# EAGLE board CT_schematic (EAGLE 7.6.0)

Size 100 x 80 mm. Coordinates in mm from the lower left corner, seen from the top.
Outline: 0,0 100,0 100,80 0,80 0,0
Copper layers (1*16): Top 0.035mm / dielectric 1.5mm / Bottom 0.035mm
Design rules "default": minimum track width 10mil, minimum drill 24mil, track to track 8mil, track to pad 8mil, pad to pad 8mil, via to via 8mil, smd to smd 8mil, copper to edge 40mil, drill to drill 8mil, minimum pad ring 10mil, minimum via ring 8mil, stop-mask expansion 4mil, vias tented up to drill 0mil, thermal gap 10mil

## Footprints (pad centres in the part's own frame; a part is rotated, then mirrored left to right if it is on the bottom)
C0603 = smd 0.8 x 0.8: 1 -0.762,0; 2 0.762,0
C0402 = smd 0.5 x 0.5: 1 -0.508,0; 2 0.508,0
C1210 = smd 1.2 x 2.5: 1 -1.524,0; 2 1.524,0
R0603 = smd 0.8 x 0.8: 1 -0.762,0; 2 0.762,0
EXV-9H = smd 3.505 x 1.676: 1 -2.857,0; 2 2.857,0
L0603 = smd 0.8 x 0.8: 1 -0.762,0; 2 0.762,0
IND25X25CZ = smd 2.489 x 3.429: 1 -2.718,0; 2 2.718,0
PJ-037B_PACKAGE = drill 3.7 square: 1 12,0 | drill 3.2 square: 2 6,0
LQFP48 = smd 0.3 x 1.2: 1 -2.75,-4.25; 2 -2.25,-4.25; 3 -1.75,-4.25; 4 -1.25,-4.25; 5 -0.75,-4.25; 6 -0.25,-4.25; 7 0.25,-4.25; 8 0.75,-4.25; 9 1.25,-4.25; 10 1.75,-4.25; 11 2.25,-4.25; 12 2.75,-4.25; 25 2.75,4.25; 26 2.25,4.25; 27 1.75,4.25; 28 1.25,4.25; 29 0.75,4.25; 30 0.25,4.25; 31 -0.25,4.25; 32 -0.75,4.25; 33 -1.25,4.25; 34 -1.75,4.25; 35 -2.25,4.25; 36 -2.75,4.25 | smd 1.2 x 0.3: 13 4.25,-2.75; 14 4.25,-2.25; 15 4.25,-1.75; 16 4.25,-1.25; 17 4.25,-0.75; 18 4.25,-0.25; 19 4.25,0.25; 20 4.25,0.75; 21 4.25,1.25; 22 4.25,1.75; 23 4.25,2.25; 24 4.25,2.75; 37 -4.25,2.75; 38 -4.25,2.25; 39 -4.25,1.75; 40 -4.25,1.25; 41 -4.25,0.75; 42 -4.25,0.25; 43 -4.25,-0.25; 44 -4.25,-0.75; 45 -4.25,-1.25; 46 -4.25,-1.75; 47 -4.25,-2.25; 48 -4.25,-2.75
SAMTEC_FTSH-105-01-L-DV-K = smd 0.762 x 2.794: 1 -2.54,-2.032; 2 -2.54,2.032; 3 -1.27,-2.032; 4 -1.27,2.032; 5 0,-2.032; 6 0,2.032; 7 1.27,-2.032; 8 1.27,2.032; 9 2.54,-2.032; 10 2.54,2.032
QFN-32 = smd 0.6 x 0.3: 1 -2.3,1.75; 2 -2.3,1.25; 3 -2.3,0.75; 4 -2.3,0.25; 5 -2.3,-0.25; 6 -2.3,-0.75; 7 -2.3,-1.25; 8 -2.3,-1.75; 17 2.3,-1.75; 18 2.3,-1.25; 19 2.3,-0.75; 20 2.3,-0.25; 21 2.3,0.25; 22 2.3,0.75; 23 2.3,1.25; 24 2.3,1.75 | smd 0.3 x 0.6: 9 -1.75,-2.3; 10 -1.25,-2.3; 11 -0.75,-2.3; 12 -0.25,-2.3; 13 0.25,-2.3; 14 0.75,-2.3; 15 1.25,-2.3; 16 1.75,-2.3; 25 1.75,2.3; 26 1.25,2.3; 27 0.75,2.3; 28 0.25,2.3; 29 -0.25,2.3; 30 -0.75,2.3; 31 -1.25,2.3; 32 -1.75,2.3 | smd 3.2 x 3.2: EXP 0,0
SJ-43515TS-SMT-TR = smd 2.2 x 3: 1 0.6,-7.4; 4 3.4,-7.4 | smd 3 x 3: 2 12.8,-7.4; 5 17,-3 | smd 2 x 3: 3 5.3,0; 6 2.5,0 | drill 1.8: P$7 4.5,-3.69; P$8 11.54,-3.69
WM-64PC = drill 0.6 pad 1: 1 -1,0.95; 2 -1,-0.95
VQFN-16 = smd 1.105 x 0.381: 1 -1.822,0.975; 2 -1.822,0.325; 3 -1.822,-0.325; 4 -1.822,-0.975; 9 1.822,-0.975; 10 1.822,-0.325; 11 1.822,0.325; 12 1.822,0.975 | smd 0.381 x 1.105: 5 -0.975,-1.822; 6 -0.325,-1.822; 7 0.325,-1.822; 8 0.975,-1.822; 13 0.975,1.822; 14 0.325,1.822; 15 -0.325,1.822; 16 -0.975,1.822
HTSS-105-01-G-D = drill 1 pad 1.8 square: 1 0,0 | drill 1 pad 1.8: 2 0,2.54; 3 2.54,0; 4 2.54,2.54; 5 5.08,0; 6 5.08,2.54; 7 7.62,0; 8 7.62,2.54; 9 10.16,0; 10 10.16,2.54
ASEK = smd 1.4 x 1: 1 -1.1,-0.8; 2 1.1,-0.8; 3 1.1,0.8; 4 -1.1,0.8
ASFL1 = smd 1.7 x 1.5: 1 -1.27,-1.1; 2 1.27,-1.1; 3 1.27,1.1; 4 -1.27,1.1
IR3899MTR1PBF = smd 0.25 x 0.75: 1 0,0; 2 0.5,0; 3 1,0; 4 1.5,0; 5 2,0; 6 2.5,0; 7 3,0 | smd 0.75 x 0.25: 8 3.425,0.78; 9 3.425,1.28; 10 3.425,1.78; 14 -0.425,1.78; 15 -0.425,1.28; 16 -0.425,0.78 | smd 0.3 x 1.95: 11 3.22,3.63 | smd 1.62 x 2.42: 12 1.786,3.8 | smd 1 x 1.95: 13 0.117,3.63 | smd 2.19 x 1.25: 17 1.51,1.26
SON-6 = smd 0.55 x 0.3: 1 -0.355,0.5 | smd 0.52 x 0.3: 2 -0.37,0; 3 -0.37,-0.5; 4 0.37,-0.5; 5 0.37,0; 6 0.37,0.5
SW_4-1437565-2 = smd 1.4 x 2.1: 1 -2.23,4.55; 2 -2.23,-4.55; 3 2.23,4.55; 4 2.23,-4.55
LGM67K-G1J2-24-Z = smd 0.8 x 1.4: A -2,0; C 0,0
NC7SZ125M5X = smd 1.3 x 0.7: 1 -1.3,0.95; 2 -1.3,0; 3 -1.3,-0.95; 4 1.3,-0.95; 5 1.3,0.95

## Placement (x,y rotation side)
C1  1e-06  [C0603]  -19.05,78.74 0 top  (outside the outline)
C2  1e-07  [C0603]  -22.86,78.74 0 top  (outside the outline)
C3  1e-07  [C0603]  -26.67,78.74 0 top  (outside the outline)
C4  1e-07  [C0603]  -30.48,78.74 0 top  (outside the outline)
C5  1e-07  [C0603]  -34.29,78.74 0 top  (outside the outline)
C6  1e-07  [C0603]  -38.1,78.74 0 top  (outside the outline)
C7  4.7e-06  [C0603]  -80.01,73.66 0 top  (outside the outline)
C8  2.2e-06  [C0603]  -83.82,73.66 0 top  (outside the outline)
C9  1e-08  [C0603]  -41.91,78.74 0 top  (outside the outline)
C10  1e-06  [C0603]  -45.72,78.74 0 top  (outside the outline)
C11  1e-07  [C0402]  -53.34,83.82 0 top  (outside the outline)
C12  1e-06  [C0603]  -49.53,78.74 0 top  (outside the outline)
C13  1e-06  [C0603]  -53.34,78.74 0 top  (outside the outline)
C14  1e-06  [C0603]  -57.15,78.74 0 top  (outside the outline)
C15  1e-06  [C0603]  -60.96,78.74 0 top  (outside the outline)
C16  1e-06  [C0603]  -64.77,78.74 0 top  (outside the outline)
C17  1e-06  [C0603]  -68.58,78.74 0 top  (outside the outline)
C18  1e-06  [C0603]  -72.39,78.74 0 top  (outside the outline)
C19  1e-07  [C0402]  -57.15,83.82 0 top  (outside the outline)
C20  1e-07  [C0402]  -60.96,83.82 0 top  (outside the outline)
C21  1e-07  [C0402]  -64.77,83.82 0 top  (outside the outline)
C22  1e-07  [C0402]  -68.58,83.82 0 top  (outside the outline)
C23  1e-06  [C0603]  -76.2,78.74 0 top  (outside the outline)
C24  1e-07  [C0402]  -72.39,83.82 0 top  (outside the outline)
C25  1e-07  [C0402]  -76.2,83.82 0 top  (outside the outline)
C26  1e-06  [C0603]  -80.01,78.74 0 top  (outside the outline)
C27  1e-08  [C0402]  -80.01,83.82 0 top  (outside the outline)
C28  1e-08  [C0402]  -83.82,83.82 0 top  (outside the outline)
C29  1e-08  [C0402]  -87.63,83.82 0 top  (outside the outline)
C30  0.0001  [C1210]  -16.51,63.5 0 top  (outside the outline)
C31  2.2e-06  [C0603]  -87.63,73.66 0 top  (outside the outline)
C32  1e-07  [C0402]  -15.24,88.9 0 top  (outside the outline)
C33  1e-07  [C0402]  -19.05,88.9 0 top  (outside the outline)
C34  8.5935703950126e-09  [R0603]  -53.34,62.23 0 top  (outside the outline)
C35  2.929626271027e-07  [R0603]  -72.39,62.23 0 top  (outside the outline)
C38  0.0001  [C1210]  -22.86,63.5 0 top  (outside the outline)
C39  2.2e-06  [C0603]  -15.24,78.74 0 top  (outside the outline)
C40  1e-07  [C0402]  -22.86,88.9 0 top  (outside the outline)
C41  1e-07  [C0402]  -26.67,88.9 0 top  (outside the outline)
C42  8.5935703950126e-09  [R0603]  -63.5,62.23 0 top  (outside the outline)
C43  2.929626271027e-07  [R0603]  -81.28,62.23 0 top  (outside the outline)
C46  1e-07  [C0402]  -30.48,88.9 0 top  (outside the outline)
C47  0.0001  [EXV-9H]  -38.1,55.88 0 top  (outside the outline)
C48  0.0001  [EXV-9H]  -49.53,55.88 0 top  (outside the outline)
C49  1e-08  [C0402]  -34.29,88.9 0 top  (outside the outline)
C50  1e-08  [C0402]  -38.1,88.9 0 top  (outside the outline)
F1  240.0  [L0603]  -83.82,78.74 0 top  (outside the outline)
I1  6.8e-07  [IND25X25CZ]  -59.69,55.88 0 top  (outside the outline)
I2  6.8e-07  [IND25X25CZ]  -68.58,55.88 0 top  (outside the outline)
J1  PJ-037B  [PJ-037B_PACKAGE]  -83.82,21.59 0 top  (outside the outline)
R1  10000.0  [R0603]  -87.63,68.58 0 top  (outside the outline)
R2  1000.0  [R0603]  -87.63,78.74 0 top  (outside the outline)
R3  1600.5  [R0603]  -15.24,83.82 0 top  (outside the outline)
R4  4700.0  [R0603]  -19.05,83.82 0 top  (outside the outline)
R5  10000.0  [R0603]  -15.24,73.66 0 top  (outside the outline)
R6  10000.0  [R0603]  -20.32,73.66 0 top  (outside the outline)
R7  10000.0  [R0603]  -25.4,73.66 0 top  (outside the outline)
R8  10000.0  [R0603]  -30.48,73.66 0 top  (outside the outline)
R9  10000.0  [R0603]  -35.56,73.66 0 top  (outside the outline)
R10  5.0  [R0603]  -22.86,83.82 0 top  (outside the outline)
R11  1270.0  [R0603]  -26.67,83.82 0 top  (outside the outline)
R12  1270.0  [R0603]  -30.48,83.82 0 top  (outside the outline)
R13  10000.0  [R0603]  -40.64,73.66 0 top  (outside the outline)
R14  10000.0  [R0603]  -45.72,73.66 0 top  (outside the outline)
R15  0.1  [R0603]  -34.29,83.82 0 top  (outside the outline)
R16  4030.2416170974  [R0603]  -19.05,68.58 0 top  (outside the outline)
R17  2878.7440122125  [R0603]  -26.67,68.58 0 top  (outside the outline)
R18  59.319518072289  [R0603]  -34.29,68.58 0 top  (outside the outline)
R19  130.0  [R0603]  -38.1,83.82 0 top  (outside the outline)
R20  39000.0  [R0603]  -50.8,73.66 0 top  (outside the outline)
R21  49900.0  [R0603]  -55.88,73.66 0 top  (outside the outline)
R22  5216.2133333333  [R0603]  -41.91,68.58 0 top  (outside the outline)
R23  0.1  [R0603]  -41.91,83.82 0 top  (outside the outline)
R24  4030.2416170974  [R0603]  -49.53,68.58 0 top  (outside the outline)
R25  719.68600305311  [R0603]  -57.15,68.58 0 top  (outside the outline)
R26  59.319518072289  [R0603]  -64.77,68.58 0 top  (outside the outline)
R27  130.0  [R0603]  -45.72,83.82 0 top  (outside the outline)
R28  39000.0  [R0603]  -60.96,73.66 0 top  (outside the outline)
R29  49900.0  [R0603]  -66.04,73.66 0 top  (outside the outline)
R30  5216.2133333333  [R0603]  -72.39,68.58 0 top  (outside the outline)
R31  10000.0  [R0603]  -71.12,73.66 0 top  (outside the outline)
R32  10000.0  [R0603]  -76.2,73.66 0 top  (outside the outline)
R33  9100.0  [R0603]  -49.53,83.82 0 top  (outside the outline)
R34  680000.0  [R0603]  -77.47,68.58 0 top  (outside the outline)
R35  120000.0  [R0603]  -82.55,68.58 0 top  (outside the outline)
U1  STM32F410CBT3  [LQFP48]  -83.82,34.29 0 top  (outside the outline)
U2  FTSH-105-01-L-DV-K  [SAMTEC_FTSH-105-01-L-DV-K]  -35.56,7.62 0 top  (outside the outline)
U3  SGTL5000XNAA3  [QFN-32]  -22.86,46.99 0 top  (outside the outline)
U4  SJ-43515TS-SMT-TR  [SJ-43515TS-SMT-TR]  -68.58,10.16 0 top  (outside the outline)
U5  SJ-43515TS-SMT-TR  [SJ-43515TS-SMT-TR]  -39.37,24.13 0 top  (outside the outline)
U6  SJ-43515TS-SMT-TR  [SJ-43515TS-SMT-TR]  -67.31,24.13 0 top  (outside the outline)
U7  WM-64PCT  [WM-64PC]  -68.58,34.29 0 top  (outside the outline)
U8  TSC2046IRGVR  [VQFN-16]  -29.21,62.23 0 top  (outside the outline)
U9  HTSS-105-01-G-D  [HTSS-105-01-G-D]  -43.18,45.72 0 top  (outside the outline)
U10  ASEK-32.768KHz-ECST  [ASEK]  -29.21,55.88 0 top  (outside the outline)
U11  ASFL-24.57MHZ-NCS  [ASFL1]  -62.23,45.72 0 top  (outside the outline)
U12  ASFL1-25MHZ-NCS  [ASFL1]  -78.74,45.72 0 top  (outside the outline)
U13  IR3899MTR1PBF  [IR3899MTR1PBF]  -44.45,31.75 0 top  (outside the outline)
U14  IR3899MTR1PBF  [IR3899MTR1PBF]  -59.69,31.75 0 top  (outside the outline)
U15  TPS3895ADRYR  [SON-6]  -40.64,87.63 0 top  (outside the outline)
U16  4-1437565-2  [SW_4-1437565-2]  -27.94,35.56 0 top  (outside the outline)
U17  Q65110A2395  [LGM67K-G1J2-24-Z]  -77.47,55.88 0 top  (outside the outline)
U18  nc7sz125m5x  [NC7SZ125M5X]  -35.56,62.23 0 top  (outside the outline)
U19  nc7sz125m5x  [NC7SZ125M5X]  -41.91,62.23 0 top  (outside the outline)

## Library data of the parts
C1-C35 C38-C43 C46-C50 F1 I1 I2 J1 R1-R35 U1-U19 = circuit_tree

## Nets
CLK_U1_3: U1.3 U10.3
CLK_U1_5: U1.5 U12.3
CLK_U3_21: U3.21 U11.3
GND: C1.2 C2.2 C3.2 C4.2 C5.2 C6.2 C7.2 C8.2 C9.2 C10.2 C11.2 C19.2 C20.2 C21.2 C22.2 C23.2 C24.2 C25.2 C26.2 C27.2 C28.2 C29.2 C31.2 C32.2 C33.2 C39.2 C40.2 C41.2 C46.2 C47.2 C48.2 C49.2 C50.2 J1.2 R2.2 R5.2 R10.2 R12.2 R15.1 R15.2 R17.2 R20.2 R22.2 R23.1 R23.2 R25.2 R28.2 R30.2 R33.2 R35.2 U1.8 U1.23 U1.35 U1.46 U2.3 U2.5 U3.1 U3.3 U3.7 U3.EXP U5.1 U6.1 U7.2 U8.10 U9.9 U10.2 U11.2 U12.2 U13.4 U13.11 U13.17 U14.4 U14.11 U14.17 U15.2 U17.C U18.2 U18.3 U19.1 U19.3
NET_U1_7: R4.1 U1.7 U19.4
NET_U1_9: C9.1 C10.1 F1.1 U1.9
NET_U1_22: C8.1 U1.22
NET_U1_43: R3.1 U1.43 U17.A
NET_U1_44: R5.1 U1.44
NET_U1_45: R1.1 U1.45 U16.3 U16.4
NET_U1_47: R6.1 U1.47
NET_U2_9: R10.1 U2.9
NET_U3_10: C22.1 U3.10
NET_U3_29: R11.1 U3.29
NET_U3_31: R12.1 U3.31
NET_U4_1: U3.4 U4.1
NET_U4_2: U3.2 U4.2
NET_U4_5: U3.6 U4.5
NET_U5_2: C13.1 U5.2
NET_U5_5: C12.1 U5.5
NET_U5_11: C13.2
NET_U5_12: C12.2
NET_U6_2: C15.1 C16.1 U6.2
NET_U6_5: C14.1 U6.5
NET_U6_13: C15.2 C16.2
NET_U6_14: C14.2
NET_U7_1: C17.1 C18.1 C23.1 U3.16 U7.1
NET_U7_15: C17.2 C18.2
NET_U8_15: R14.1 U8.15
NET_U9_3: U8.7 U9.3
NET_U9_4: U8.9 U9.4
NET_U9_5: U8.6 U9.5
NET_U9_6: U8.8 U9.6
NET_U13_1: C34.1 R16.1 R17.1 R18.1 R19.1 U13.1 U13.8
NET_U13_2: C33.1 U13.2
NET_U13_3: C34.2 C35.1 C35.2 U13.3
NET_U13_5: R20.1 U13.5
NET_U13_10: C31.1 U13.10
NET_U13_12: C30.1 I1.1 U13.12
NET_U13_13: U13.13
NET_U13_14: C30.2 U13.14
NET_U13_15: R21.1 R22.1 U13.15
NET_U13_ATNET_3: I1.2 R16.2
NET_U13_ATNET_4: C35.2 R18.2
NET_U13_ATNET_5: R19.2
NET_U14_1: C42.1 R24.1 R25.1 R26.1 R27.1 U14.1 U14.8
NET_U14_2: C41.1 U14.2
NET_U14_3: C42.2 C43.1 C43.2 U14.3
NET_U14_5: R28.1 U14.5
NET_U14_10: C39.1 U14.10
NET_U14_12: C38.1 I2.1 U14.12
NET_U14_13: U14.13
NET_U14_14: C38.2 U14.14
NET_U14_15: R29.1 R30.1 U14.15
NET_U14_ATNET_3: I2.2 R24.2
NET_U14_ATNET_4: C43.2 R26.2
NET_U14_ATNET_5: R27.2
NET_U15_1: R32.1 R33.1 U15.1
NET_U15_3: R34.2 R35.1 U15.3
NET_U15_4: R31.1 U15.4 U18.4 U19.2
NET_U16_1: R2.1 U16.1 U16.2
PROC_I2S2_CK: U1.21 U3.24
PROC_I2S2_SD: U1.28 U3.26
PROC_I2S2_WS: U1.25 U3.23
PROC_SPI1_MISO: U1.16 U8.16
PROC_SPI1_MOSI: U1.17 U8.2
PROC_SPI1_NSS: R13.1 U1.14 U8.3
PROC_SPI1_SCK: U1.15 U8.4
PROC_SYS_JTCK_SWCLK: R8.1 U1.37 U2.4
PROC_SYS_JTDO_SWO: U1.39 U2.6
PROC_SYS_JTMS_SWDIO: R9.1 U1.34 U2.2
RST_OUT_U2_JTAG_RST_B: R7.1 U2.10 U18.1
VCC_S1_16V6: C32.1 C40.1 C47.1 C48.1 J1.1 R21.2 R29.2 U13.9 U14.9
VCC_TIER1_1V2: C19.1 I1.2 R16.2 U3.30
VCC_TIER1_3V3: C1.1 C2.1 C3.1 C4.1 C5.1 C6.1 C7.1 C11.1 C20.1 C21.1 C24.1 C25.1 C26.1 C27.1 C28.1 C29.1 C46.1 C49.1 C50.1 F1.2 I2.2 R1.2 R3.2 R4.2 R6.2 R7.2 R8.2 R9.2 R11.2 R13.2 R14.2 R24.2 R31.2 R32.2 R34.1 U1.1 U1.24 U1.36 U1.48 U2.1 U3.5 U3.20 U8.5 U8.14 U10.4 U11.4 U12.4 U15.6 U18.5 U19.5

## Tracks (layer width: path | path; a pad name or v marks a point on that pad's centre or on a via)
CLK_U1_3  (1 unrouted)
CLK_U1_5  (1 unrouted)
CLK_U3_21  (1 unrouted)
GND  (79 unrouted)
NET_U1_7  (2 unrouted)
NET_U1_9  (3 unrouted)
NET_U1_22  (1 unrouted)
NET_U1_43  (2 unrouted)
NET_U1_44  (1 unrouted)
NET_U1_45  (3 unrouted)
NET_U1_47  (1 unrouted)
NET_U2_9  (1 unrouted)
NET_U3_10  (1 unrouted)
NET_U3_29  (1 unrouted)
NET_U3_31  (1 unrouted)
NET_U4_1  (1 unrouted)
NET_U4_2  (1 unrouted)
NET_U4_5  (1 unrouted)
NET_U5_2  (1 unrouted)
NET_U5_5  (1 unrouted)
NET_U6_2  (2 unrouted)
NET_U6_5  (1 unrouted)
NET_U6_13  (1 unrouted)
NET_U7_1  (4 unrouted)
NET_U7_15  (1 unrouted)
NET_U8_15  (1 unrouted)
NET_U9_3  (1 unrouted)
NET_U9_4  (1 unrouted)
NET_U9_5  (1 unrouted)
NET_U9_6  (1 unrouted)
NET_U13_1  (6 unrouted)
NET_U13_2  (1 unrouted)
NET_U13_3  (3 unrouted)
NET_U13_5  (1 unrouted)
NET_U13_10  (1 unrouted)
NET_U13_12  (2 unrouted)
NET_U13_14  (1 unrouted)
NET_U13_15  (2 unrouted)
NET_U13_ATNET_3  (1 unrouted)
NET_U13_ATNET_4  (1 unrouted)
NET_U14_1  (6 unrouted)
NET_U14_2  (1 unrouted)
NET_U14_3  (3 unrouted)
NET_U14_5  (1 unrouted)
NET_U14_10  (1 unrouted)
NET_U14_12  (2 unrouted)
NET_U14_14  (1 unrouted)
NET_U14_15  (2 unrouted)
NET_U14_ATNET_3  (1 unrouted)
NET_U14_ATNET_4  (1 unrouted)
NET_U15_1  (2 unrouted)
NET_U15_3  (2 unrouted)
NET_U15_4  (3 unrouted)
NET_U16_1  (2 unrouted)
PROC_I2S2_CK  (1 unrouted)
PROC_I2S2_SD  (1 unrouted)
PROC_I2S2_WS  (1 unrouted)
PROC_SPI1_MISO  (1 unrouted)
PROC_SPI1_MOSI  (1 unrouted)
PROC_SPI1_NSS  (2 unrouted)
PROC_SPI1_SCK  (1 unrouted)
PROC_SYS_JTCK_SWCLK  (2 unrouted)
PROC_SYS_JTDO_SWO  (1 unrouted)
PROC_SYS_JTMS_SWDIO  (2 unrouted)
RST_OUT_U2_JTAG_RST_B  (2 unrouted)
VCC_S1_16V6  (8 unrouted)
VCC_TIER1_1V2  (3 unrouted)
VCC_TIER1_3V3  (49 unrouted)